# Altium PCB RS485集线器.PcbDoc
Units mm, origin at the board's own origin, x right, y up, seen from the top; angles counter-clockwise.
Board outline 75.5 x 100 mm, 2 copper layers (Top Layer, Bottom Layer); 91 components, 148 nets, 377 pads, 105 vias.
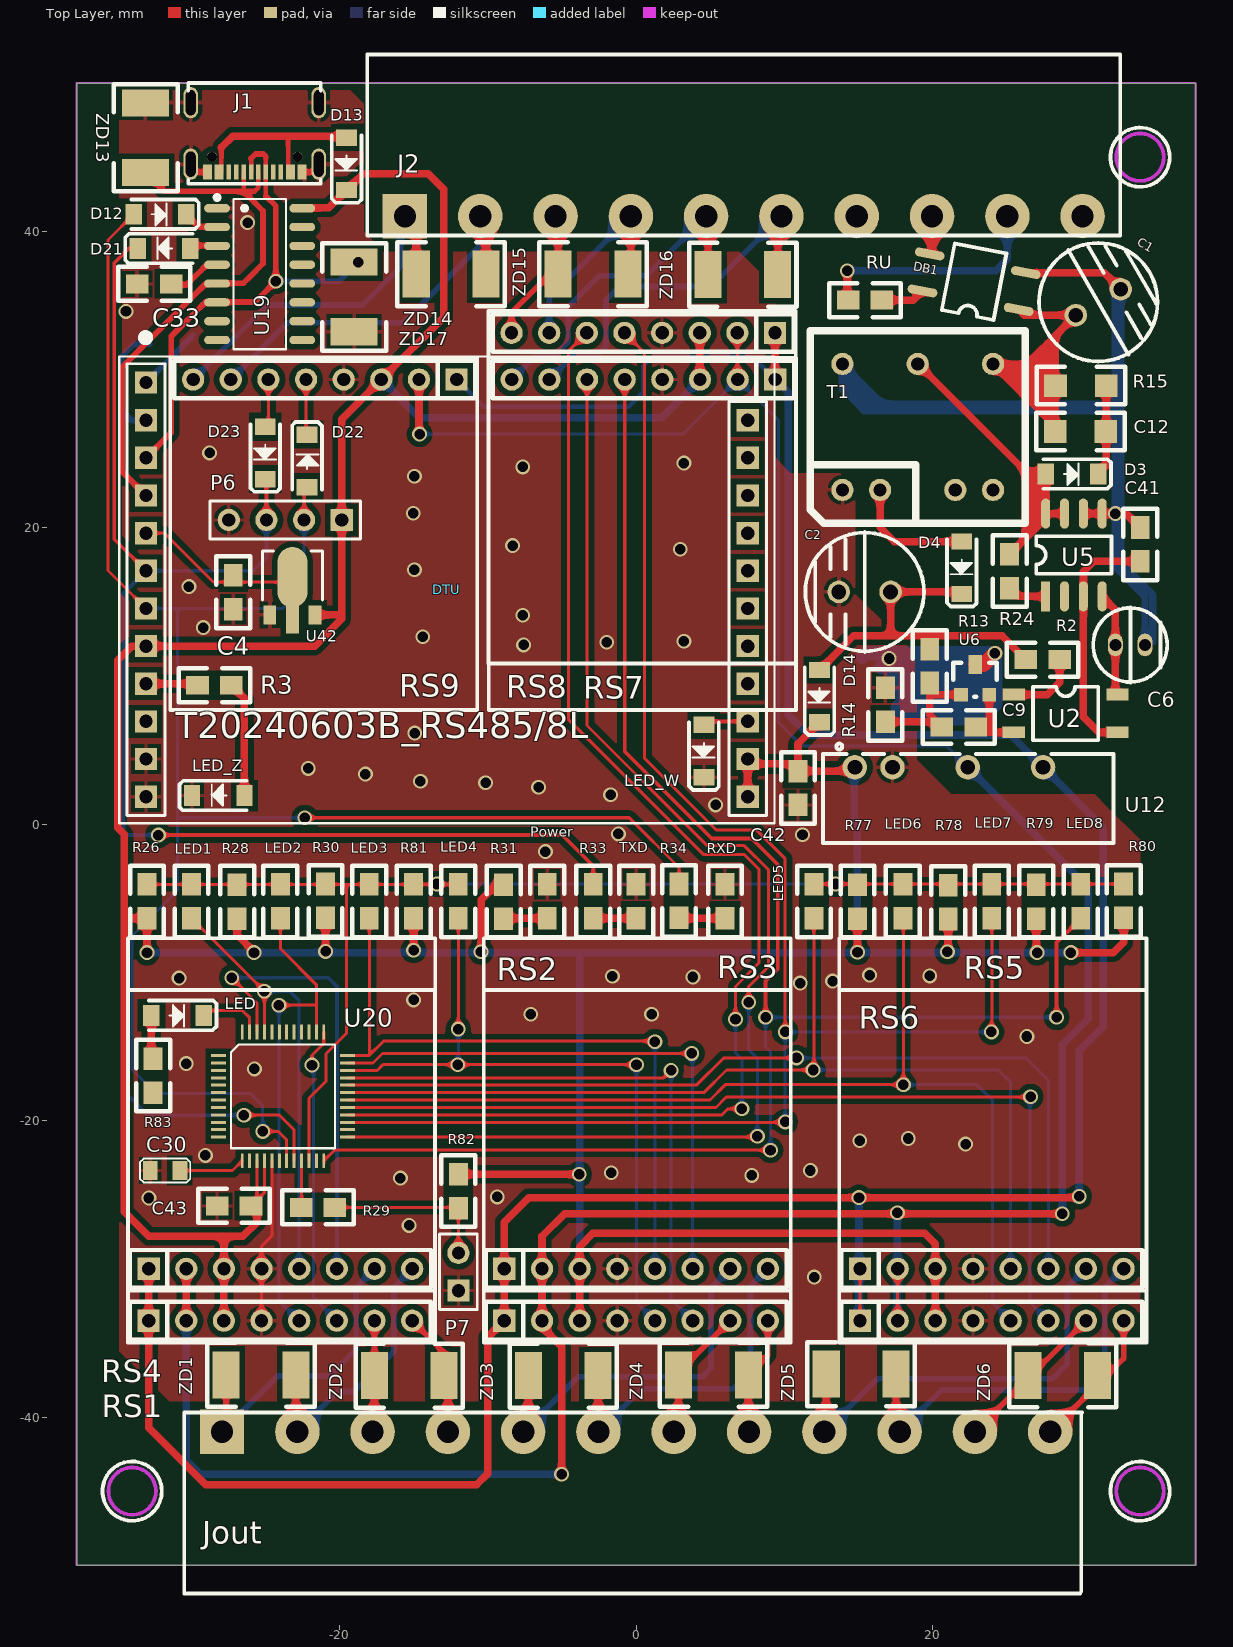
[diagram p0: Top Layer view]
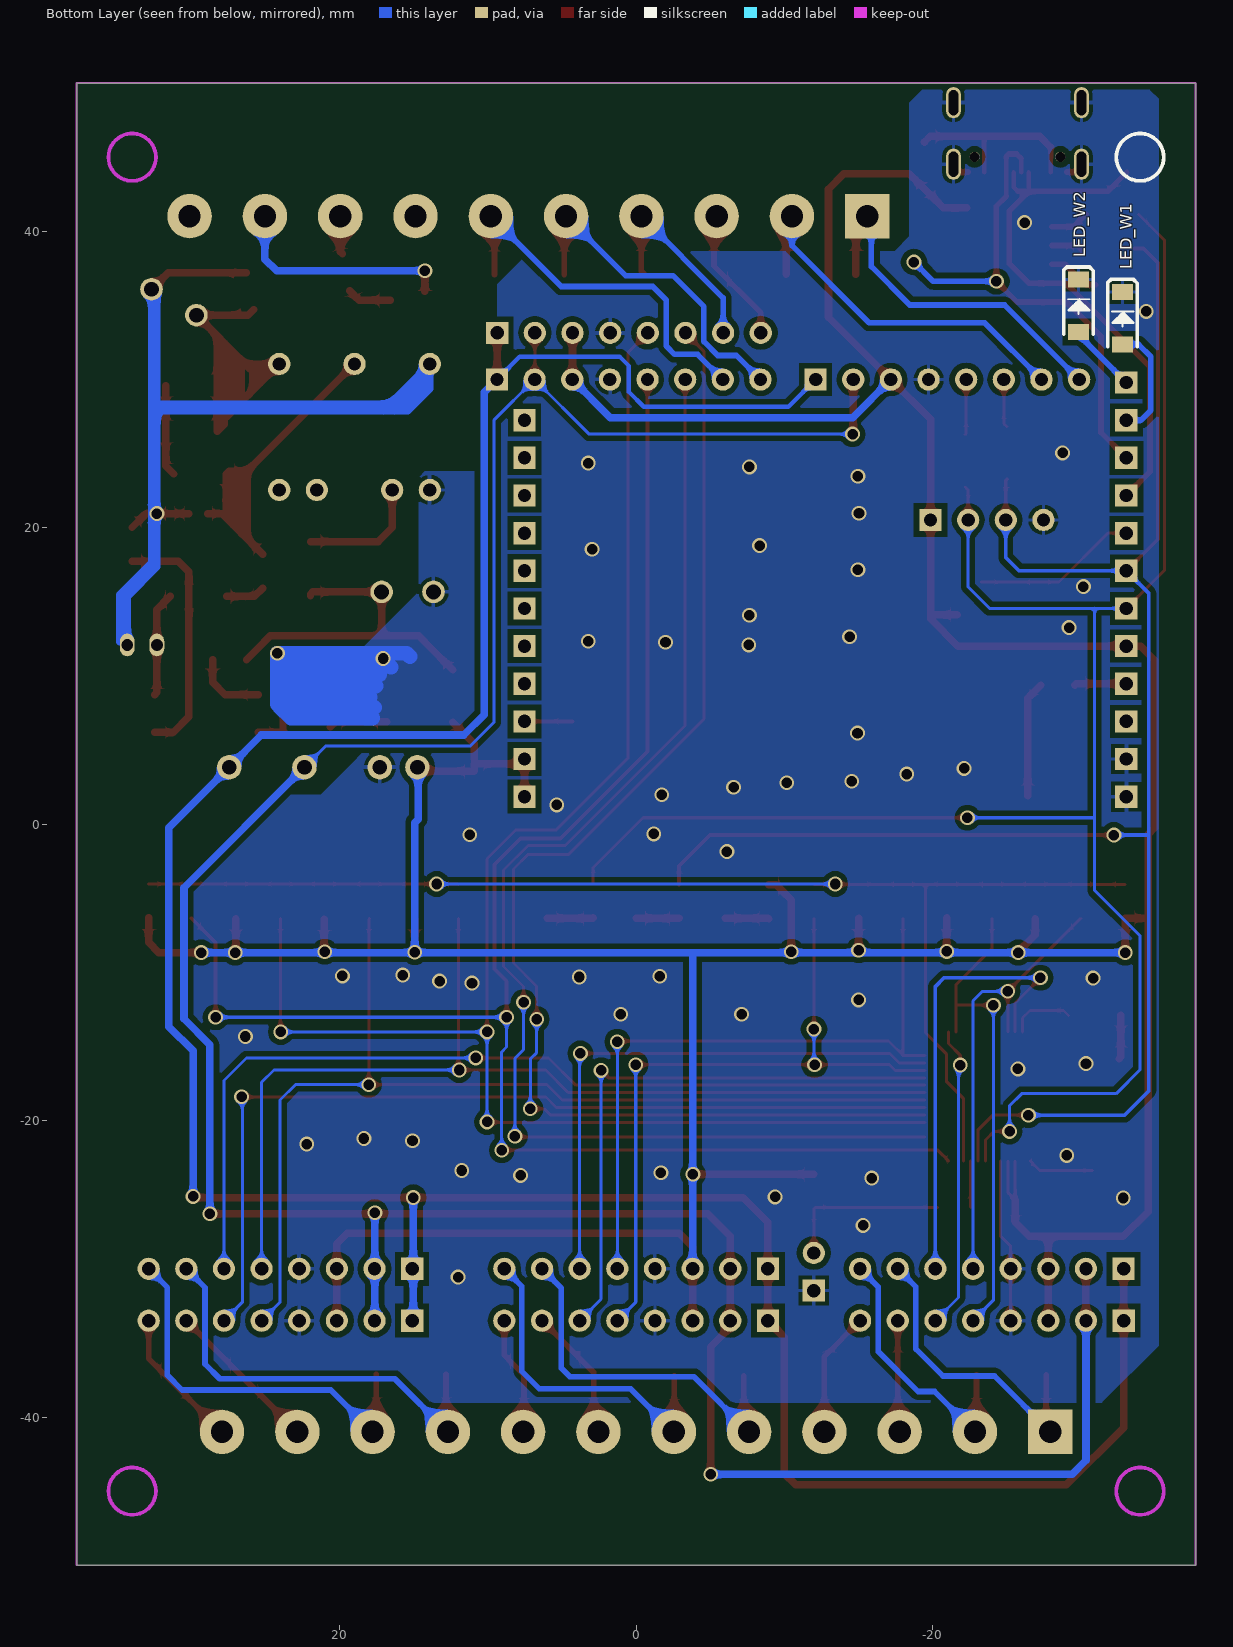
[diagram p1: Bottom Layer view, seen from below]

## Layer stack, top to bottom
Top Solder: solder mask 0.0102, Solder Resist, Dk 3.5
Top Layer: signal copper 0.0356
Dielectric1: dielectric 0.32, FR-4, Dk 4.8
Bottom Layer: signal copper 0.0356
Bottom Solder: solder mask 0.0102, Solder Resist, Dk 3.5

## Board outline
-37.75,-50 -37.75,50 37.75,50 37.75,-50

## Design rules (kind name [scope] priority, off if disabled: settings)
Clearance Clearance_1 [InPolygon] p1: gap=0.381
Clearance [All] p2: gap=0.127
DiffPairsRouting [All] p1: maxlimit=0.254 minlimit=0.254 mostfreqgap=0.254 toplayer_minwidth=0.381 toplayer_maxwidth=0.381 toplayer_prefwidth=0.381 bottomlayer_minwidth=0.381 bottomlayer_maxwidth=0.381 bottomlayer_prefwidth=0.381 maxuncoupledlength=12.7
PolygonConnect PolygonConnect_1 [IsVia] p1: connectstyle=Direct reliefconductorwidth=0.254 reliefentries=4 polygonreliefangle="90 Angle" airgapwidth=0.254
PolygonConnect [All] p2: connectstyle=Relief reliefconductorwidth=0.254 reliefentries=4 polygonreliefangle="90 Angle" airgapwidth=0.254
RoutingVias [All] p1: holewidth=0.711 width=1.27 viastyle="Through Hole" minholewidth=0.711 minwidth=1.27 maxholewidth=0.711 maxwidth=1.27
SilkToSolderMaskClearance SilkscreenOverComponentPads [IsPad] p1: minsilkscreentomaskgap=0.025 clearancetoexposedcopper=TRUE
SolderMaskExpansion [All] p1: expansion=0.102
Width [All] p1: maxlimit=5.08 minlimit=0.127 preferedwidth=0.254
28 further rules are at their usual default settings.

## Classes and differential pairs
component class Sheet2: D10 D11 J1 P6 P7 R29 R32 R33 R34 R35 R36
component class rs485: C70 L4 R3 R4 R5 R6 R7 R8 R9 R10 R11 R12 R19 U3 U4 U12 U19
differential pair USB: +USB_P -USB_N
differential pair 4851: +4851_P -4851_N
differential pair 4852: +4852_P -4852_N
differential pair 4853: +4853_P -4853_N
differential pair 4854: +4854_P -4854_N
differential pair 4855: +4855_P -4855_N
differential pair 4856: +4856_P -4856_N
differential pair 4857: +4857_P -4857_N
differential pair 4858: +4858_P -4858_N

## Components (designator, comment, footprint, x,y, rotation, side; value= is the part's Value field where it differs from the comment)
C1 "400V/4.7uF" cap8mm 29.667,34.341 r30 top (schematic designator C01)
C2 "10V/1000uF" cap8mm 17.17,15.672 r180 top (schematic designator C01)
C4 "10uF" 0805#1 -27.178,16.789 r270 top
C6 "50V/22uF" cap5mm 32.334,12.09 r0 top (schematic designator C03)
C9 "104" 0805#2 22.911,6.553 r180 top
C12 "103" 1206 28.27,26.492 r0 top
C30 "0.1uF/16V/X5R" 0805C -30.785,-23.368 r180 top (schematic designator C16)
C33 "0.1uF/50V/X5R" 0805#1 -31.369,36.449 r180 top
C41 "103" 0805#3 34.011,17.729 r90 top
C42 "106" 0805#3 10.922,1.295 r90 top
C43 "105" 0805#3 -25.984,-25.756 r180 top
D3 "ES1JS/SOD-123" "D SOD-123(B)" 29.413,23.622 r180 top (schematic designator D7)
D4 "1N5819W/SOD-123" "D SOD-123(B)" 21.971,17.297 r90 top (schematic designator D7)
D12 "1N5819/SOD-123" "D SOD-123(B)" -32.131,41.148 r180 top (schematic designator D7)
D13 "1N5819/SOD-123" "D SOD-123(B)" -19.533,44.552 r90 top (schematic designator D7)
D14 "1N5819/SOD-123" "D SOD-123(B)" 12.37,8.636 r90 top (schematic designator D7)
D21 "1N5819/SOD-123" "D SOD-123(B)" -31.852,38.837 r0 top (schematic designator D7)
D22 "1N5819/SOD-123" "D SOD-123(B)" -22.2,24.511 r270 top (schematic designator D7)
D23 "1N5819/SOD-123" "D SOD-123(B)" -25.019,25.044 r90 top (schematic designator D7)
DB1 "MB6S" SO-4#1 25.806,34.722 r169 top
DTU "Comment" USR-GPRS232-7S3_LIB_V1.0 -33.071,29.794 r0 top
J1 "TYPE C_16P" TYPEC_16P -25.73,48.285 r180 top
J2 "CON10" SIP5.08-10 7.264,41.021 r0 top
Jout "Comment" PCBComponent_1#1 0,-41 r0 top locked
LED "1N5819/SOD-123" "D SOD-123(B)" -30.937,-12.903 r180 top (schematic designator D7)
LED1 "蓝色" 0805#4 -30,-4.064 r270 top
LED2 "蓝色" 0805#4 -24,-4.064 r270 top
LED3 "蓝色" 0805#4 -18,-4.064 r270 top
LED4 "蓝色" 0805#4 -12,-4.064 r270 top
LED5 "蓝色" 0805#4 12,-4.064 r270 top
LED6 "蓝色" 0805#4 18,-4.064 r270 top
LED7 "蓝色" 0805#4 24,-4.064 r270 top
LED8 "蓝色" 0805#4 30,-4.064 r270 top
LED_W "1N5819/SOD-123" "D SOD-123(B)" 4.572,4.928 r90 top (schematic designator D7)
LED_W1 "1N5819/SOD-123" "D SOD-123(B)" -32.817,34.138 r270 bottom (schematic designator D7)
LED_W2 "1N5819/SOD-123" "D SOD-123(B)" -29.845,34.976 r270 bottom (schematic designator D7)
LED_Z "1N5819/SOD-123" "D SOD-123(B)" -28.194,1.93 r0 top (schematic designator D7)
P6 "Header 4" HDR1X4 -19.863,20.523 r180 top
P7 "Header 2" HDR1X2 -11.989,-31.471 r90 top
Power "红色" 0805#4 -6,-4.064 r270 top
R2 "330R" 0805#4 28.575,11.1 r180 top
R3 "1K" 0805#1 -29.591,9.373 r0 top
R13 "3.3K" 0805#5 19.812,9.525 r90 top
R14 "10K" 0805#6 16.815,9.195 r270 top
R15 "75K" 1206 28.296,29.591 r0 top
R24 "2.2M" 0805#6 25.197,18.212 r270 top
R26 "1K" 0805#4 -33,-4.064 r270 top
R28 "1K" 0805#4 -26.924,-4.089 r270 top
R29 "10K" 0805#4 -20.32,-25.857 r180 top
R30 "1K" 0805#4 -20.955,-4.039 r270 top
R31 "1K" 0805#4 -8.941,-4.089 r270 top
R33 "1K" 0805#4 -2.896,-4.064 r270 top
R34 "1K" 0805#4 2.896,-4.039 r270 top
R77 "1K" 0805#4 14.935,-4.089 r270 top
R78 "1K" 0805#4 21.057,-4.115 r270 top
R79 "1K" 0805#4 27,-4.089 r270 top
R80 "1K" 0805#4 32.893,-4.039 r270 top
R81 "1K" 0805#4 -15.011,-4.064 r270 top
R82 "10K" 0805#4 -11.989,-25.908 r90 top
R83 "1K" 0805#4 -32.588,-15.824 r270 top
RS1 "RS485" PCBComponent_1#2 -24.003,-33.5 r0 top
RS2 "RS485" PCBComponent_1#2 0,-33.5 r0 top
RS3 "RS485" PCBComponent_1#2 24,-33.5 r0 top
RS4 "RS485" PCBComponent_1#2 -24,-30 r0 top
RS5 "RS485" PCBComponent_1#2 0,-30 r0 top
RS6 "RS485" PCBComponent_1#2 24,-30 r0 top
RS7 "RS485" PCBComponent_1#2 0.483,33.147 r180 top
RS8 "RS485" PCBComponent_1#2 0.5,30 r180 top
RS9 "RS485" PCBComponent_1#2 -21,30 r180 top locked
RU "0R" 0805#3 16.586,35.357 r180 top
RXD "蓝色" 0805#4 6,-4.064 r270 top
T1 "Comment" ? 18.999,26.797 r0 top
TXD "绿色" 0805#4 0,-4.064 r270 top
U2 "EL357" SO-4#2 28.981,7.468 r0 top
U5 "DK106" SO-8 27.635,15.367 r90 top
U6 "TL432" SOT-23 21.92,8.738 r0 top
U12 "B0505LS-1W" PWRM-TH_4P-L19.7-W6.0-P2.54 21.107,3.835 r0 top
U19 "CH340C" SOP-16_L10.0-W3.9-P1.27-LS6.0-BL -25.4,37.109 r270 top
U20 "STC8H4K64TCL_48" LQPF48 -23.825,-18.364 r270 top
U42 "LM1117" SOT-89 -24.714,14.122 r180 top
ZD1 "SMBJ6.5CA" 1812 -22.962,-37.16 r0 top (schematic designator ZD8)
ZD2 "SMBJ6.5CA" 1812 -12.954,-37.211 r0 top (schematic designator ZD8)
ZD3 "SMBJ6.5CA" 1812 -2.565,-37.211 r0 top (schematic designator ZD8)
ZD4 "SMBJ6.5CA" 1812 7.569,-37.16 r0 top (schematic designator ZD8)
ZD5 "SMBJ6.5CA" 1812 17.526,-37.109 r0 top (schematic designator ZD8)
ZD6 "SMBJ6.5CA" 1812 31.14,-37.186 r0 top (schematic designator ZD8)
ZD13 "SMBJ6.5CA" 1812 -33.096,43.967 r270 top (schematic designator ZD8)
ZD14 "SMBJ6.5CA" 1812 -10.135,37.109 r0 top (schematic designator ZD8)
ZD15 "SMBJ6.5CA" 1812 -0.559,37.109 r0 top (schematic designator ZD8)
ZD16 "SMBJ6.5CA" 1812 9.55,37.084 r0 top (schematic designator ZD8)
ZD17 "SMBJ6.5CA" 1812 -19.025,33.223 r270 top (schematic designator ZD8)

## Footprints (in the part's own frame and the unit in brackets; to place one, negate y for a bottom-side part, rotate by r counter-clockwise, add the part's x,y. Pads: shape width x height; smd on the part's side, far side on the other; paste and mask are expansions set on the pad)
0805#1 [mil]
  rect 60x50 smd: 1(0,0) 2(90,0)
  silkscreen extent -50,-45 140,45
0805#2 [mil]
  rect 60x50 smd: 33(0,0) 34(90,0)
  silkscreen extent -50,-45 140,45
0805#3 [mil]
  rect 60x50 smd: 19(0,0) 20(90,0)
  silkscreen extent -50,-45 140,45
0805#4 [mil]
  rect 60x50 smd: 37(0,0) 38(90,0)
  silkscreen extent -50,-45 140,45
0805#5 [mil]
  rect 60x50 smd: 35(0,0) 36(90,0)
  silkscreen extent -50,-45 140,45
0805#6 [mil]
  rect 60x50 smd: 31(0,0) 32(90,0)
  silkscreen extent -50,-45 140,45
0805C [mm]
  rect 1x1.3 smd: 1(0,0) 2(2,0)
  silkscreen extent -0.7,-0.8 2.7,0.8
1206 [mil]
  rect 60x60 smd: 17(0,0) 18(135,0)
  silkscreen extent -50,-50 185,50
1812 [mil]
  rect 71.81x125 smd: 1(0,0) 2(-185,0)
  silkscreen extent -235,-85 50,85
cap5mm [mm]
  oval 1x1.524 hole 0.8: 1(0,0) 2(2,0)
  silkscreen extent -1.5,-2.54 3.5,2.54
cap8mm [mil]
  round 60 hole 39.37: 1(0,0) 2(137.8,0)
  silkscreen extent -89,-160 226,160
"D SOD-123(B)" [mm]
  rect 1.1x1.4 smd: A(1.77,0) K(-1.77,0)
  silkscreen extent -2.62,-1 1.93,1
HDR1X2 [mm] "Connector; Header; 2 Position"
  rect 1.5x1.5 hole 0.9: 1(0,0)
  round 1.5 hole 0.9: 2(2.54,0)
  silkscreen extent -1.27,-1.27 3.81,1.27
HDR1X4 [mm] "Connector; Header; 4 Position"
  rect 1.5x1.5 hole 0.9: 1(0,0)
  round 1.5 hole 0.9: 2(2.54,0) 3(5.08,0) 4(7.62,0)
  silkscreen extent -1.27,-1.27 8.89,1.27
LQPF48 [mm]
  rect 0.2x1 smd: 1(-2.75,-4.35) 2(-2.25,-4.35) 3(-1.75,-4.35) 4(-1.25,-4.35) 5(-0.75,-4.35) 6(-0.25,-4.35) 7(0.25,-4.35) 8(0.75,-4.35) 9(1.25,-4.35) 10(1.75,-4.35) 11(2.25,-4.35) 12(2.75,-4.35) 25(2.75,4.35) 26(2.25,4.35) 27(1.75,4.35) 28(1.25,4.35) 29(0.75,4.35) 30(0.25,4.35) 31(-0.25,4.35) 32(-0.75,4.35) 33(-1.25,4.35) 34(-1.75,4.35) 35(-2.25,4.35) 36(-2.75,4.35)
  rect 1x0.2 smd: 13(4.35,-2.75) 14(4.35,-2.25) 15(4.35,-1.75) 16(4.35,-1.25) 17(4.35,-0.75) 18(4.35,-0.25) 19(4.35,0.25) 20(4.35,0.75) 21(4.35,1.25) 22(4.35,1.75) 23(4.35,2.25) 24(4.35,2.75) 37(-4.35,2.75) 38(-4.35,2.25) 39(-4.35,1.75) 40(-4.35,1.25) 41(-4.35,0.75) 42(-4.35,0.25) 43(-4.35,-0.25) 44(-4.35,-0.75) 45(-4.35,-1.25) 46(-4.35,-1.75) 47(-4.35,-2.25) 48(-4.35,-2.75)
  silkscreen extent -3.5,-3.5 3.5,3.5
PCBComponent_1#1 [mm]
  rect 3x3 hole 1.5: 1(-27.94,0)
  round 3 hole 1.5: 2(-22.86,0) 3(-17.78,0) 4(-12.7,0) 5(-7.62,0) 6(-2.54,0) 7(2.54,0) 8(7.62,0) 9(12.7,0) 10(17.78,0) 11(22.86,0) 12(27.94,0)
  silkscreen extent -30.48,-10.9 30.1,1.3
PCBComponent_1#2 [mm]
  rect 1.5x1.5 hole 0.9: 1(-8.89,0)
  round 1.5 hole 0.9: 2(-3.81,0) 3(1.27,0) 4(3.81,0) 5(6.35,0) 6(8.89,0) 7(-6.35,0) 8(-1.27,0)
  silkscreen extent -10.29,-1.47 10.44,22.31
PWRM-TH_4P-L19.7-W6.0-P2.54 [mm]
  round 1.65 hole 1 paste+0 mask+0.05: 1(-6.35,0) 2(-3.81,0) 4(1.27,0) 6(6.35,0)
  silkscreen extent -8.5,-5.1 11.1,1.6
SIP5.08-10 [mm]
  rect 3x3 hole 1.5: 1(-22.86,0)
  round 3 hole 1.5: 2(-17.78,0) 3(-12.7,0) 4(-7.62,0) 5(-2.54,0) 6(2.54,0) 7(7.62,0) 8(12.7,0) 9(17.78,0) 10(22.86,0)
  silkscreen extent -25.4,-1.3 25.4,10.9
SO-4#1 [mil]
  oval 80x24 smd: 1(0,0) 2(0,-100) 3(260,-100) 4(260,0)
  silkscreen extent 60,-140 200,40
SO-4#2 [mil]
  rect 59.05x31.5 smd: 1(-137.8,50) 2(-137.8,-50) 3(137.8,-50) 4(137.8,50)
  silkscreen extent -87,-71 87,71
SO-8 [mil]
  rect 80x24 smd: 1(0,0)
  oval 80x24 smd: 2(0,-50) 3(0,-100) 4(0,-150) 5(220,-150) 6(220,-100) 7(220,-50) 8(220,0)
  silkscreen extent 60,-175 160,25
SOP-16_L10.0-W3.9-P1.27-LS6.0-BL [mm]
  oval 0.56x1.745 smd: 1(-4.445,-2.872) 2(-3.175,-2.872) 3(-1.905,-2.872) 4(-0.635,-2.872) 5(0.635,-2.872) 6(1.905,-2.872) 7(3.175,-2.872) 8(4.445,-2.872) 9(4.445,2.872) 10(3.175,2.872) 11(1.905,2.872) 12(0.635,2.872) 13(-0.635,2.872) 14(-1.905,2.872) 15(-3.175,2.872) 16(-4.445,2.872)
  silkscreen extent -5.33,-3.02 5.08,1.77
SOT-23 [mil]
  rect 36x36 smd: 1(0,0) 2(75,0)
  rect 36x50 smd: 3(38,80)
  silkscreen extent -20,-5 95,85
SOT-89 [mil]
  rect 34x50 smd: 1(0,0) 3(-120,0)
  rect 34x100 smd: 2(-60,0)
  oval 80x160 smd: 2(-60,-100)
  silkscreen extent -140,-170 20,-40
TYPEC_16P [mm]
  oval 1x2.1 hole 0.65 slot 1.7 at 90 deg: 1(-4.32,3.759) 1(-4.32,-0.391) 1(4.32,3.759) 1(4.32,-0.391)
  round 0.67 hole 0.67: 2(-2.89,3.259) 2(2.89,3.259)
  rect 0.3x1 smd: A1(-3.05,4.293) A4(-2.25,4.293) A5(-1.25,4.293) A6(-0.25,4.293) A7(0.25,4.293) A8(1.25,4.293) A9(2.25,4.293) A12(3.35,4.293) B1(3.05,4.293) B4(2.55,4.293) B5(1.75,4.293) B6(0.75,4.293) B7(-0.75,4.293) B8(-1.75,4.293) B9(-2.55,4.293) B12(-3.35,4.293)
  silkscreen extent -4.45,-1.73 4.49,5.07
USR-GPRS232-7S3_LIB_V1.0 [mm]
  rect 1.5x1.5 hole 0.9: 1(0,0) 2(0,-2.54) 3(0,-5.08) 4(0,-7.62) 5(0,-10.16) 6(0,-12.7) 7(0,-15.24) 8(0,-17.78) 9(0,-20.32) 10(0,-22.86) 11(0,-25.4) 12(0,-27.94) 13(40.6,-27.94) 14(40.6,-25.4) 15(40.6,-22.86) 16(40.6,-20.32) 17(40.6,-17.78) 18(40.6,-15.24) 19(40.6,-12.7) 20(40.6,-10.16) 21(40.6,-7.62) 22(40.6,-5.08) 23(40.6,-2.54)
  silkscreen extent -1.8,-29.74 42.4,3.16
? [mm]
  round 1.5 hole 0.9: 1(-5.08,-4.25) 2(-2.54,-4.25) 3(2.54,-4.25) 4(5.08,-4.25) 5(5.08,4.25) 6(0,4.25) 7(-5.08,4.25)
  silkscreen extent -7.25,-6.5 7.25,6.5

## Part data
C1 C2 C6: library part "Cap Pol1", "Polarized Capacitor (Radial)"
C30: library part CAP4, "贴片电容 20%"
D3 D4 D12 D13 D14 D21 D22 D23 LED LED_W LED_W1 LED_W2 LED_Z: library part SS23, "Schottky Barrier Re"
P6: "Header, 4-Pin"
P7: "Header, 2-Pin"
U12: library part B0505S
U42: library part VOLTERGB
ZD1 ZD2 ZD3 ZD4 ZD5 ZD6 ZD13 ZD14 ZD15 ZD16 ZD17: library part ZENER-BI

## Via types
v1: diameter 1, hole 0.711, Top Layer to Bottom Layer, 105 vias

## Nets (pads, with @x,y where several pads share a name; then routed paths per layer and width w, separated by ;. In a path a pad name is that pad's centre, name@x,y a point inside that pad or via, vN(x,y) a via of type N, cw(c..) or ccw(c..) an arc to the next point about the centre after c; other vN are vias at no path point)
0V: RS1.7 RS2.7 RS3.7 RS4.7 RS5.7 RS6.7 RS7.7 RS8.7 RS9.7 U12.4 | length 204.1
  Top Layer w0.2: RS7.7 6.833,30.017 RS8.7
  Top Layer w0.203: RS3.7 RS6.7
  Top Layer w0.508: RS1.7 -30.35,-33.497 RS4.7 ; RS9.7 -14.65,26.359 v1(-14.605,26.314) ; v1(-5.029,-43.866) -5.029,-35.255 -6.35,-33.934 RS2.7 RS5.7 -6.35,-27.813 -4.826,-26.289 v1(28.753,-26.289)
  Bottom Layer w0.2: v1(-14.605,26.314) 3.164,26.314 RS8.7 9.601,27.249 9.601,6.858 11.201,5.258 20.955,5.258 U12.4
  Bottom Layer w0.508: RS1.7 -30.353,-42.926 -29.413,-43.866 v1(-5.029,-43.866) ; v1(17.628,-26.213) 17.628,-33.478 RS3.7 ; U12.4 30.505,-4.292 30.505,-13.132 28.753,-14.884 v1(28.753,-26.289)
3.3A: C4.1 DTU.5 U42.2 | length 11.2
  Top Layer w0.203: DTU.5 -31.826,19.634 -28.524,16.332 U42.2@-23.266,16.332
5V: 
5V_OUT1: R83.38
300V+: C1.1 C12.17 DB1.1 R15.17 T1.5 | length 52.1
  Top Layer w0.5: 25.582,29.544 25.375,29.752 ; DB1.1 26.187,34.341 C1.1 28.27,32.944 ; 26.67,28.456 26.645,28.482 ; T1.5@24.511,31.047 25.375,31.047 ; T1.5@24.511,31.047 T1.5 25.375,29.752 ; T1.5@24.511,31.047 24.9,30.658 25.375,30.658 ; 25.375,29.752 25.857,29.269 ; 25.375,29.752 25.375,30.658 ; 25.375,30.658 25.857,30.658 ; 25.375,30.658 25.375,31.047 ; 25.375,31.047 25.857,31.047 ; 25.857,29.269 25.857,30.658 ; 25.857,29.269 26.645,28.482 ; 25.857,30.658 25.984,30.658 26.373,31.047 ; 25.857,30.658 25.857,31.047 ; 25.857,31.047 26.373,31.047 ; 26.373,31.047 26.772,31.445 ; 26.373,31.047 26.645,31.047 ; 26.645,28.482 26.915,28.211 ; 26.645,28.482 26.645,31.047 ; 26.645,31.047 26.924,31.047 ; 26.772,31.445 27.241,31.915 ; 26.772,31.445 28.067,31.445 ; 26.915,28.211 27.322,27.804 ; 26.915,28.211 26.924,28.219 26.924,31.047 ; 26.924,31.047 27.322,30.649 27.322,27.804 ; 26.924,31.047 27.457,31.047 ; 27.241,31.915 27.756,31.915 ; 27.241,31.915 27.756,32.429 ; 27.322,27.804 27.788,27.339 ; 27.322,27.804 27.457,27.94 27.457,31.047 ; 27.457,31.047 27.788,31.047 ; 27.756,31.915 28.207,31.915 28.27,31.979 ; 27.756,31.915 27.756,32.429 ; 27.756,31.915 27.756,31.756 28.067,31.445 ; 27.756,32.429 28.27,32.944 ; 27.756,32.429 28.15,32.429 28.27,32.309 ; 27.788,27.339 27.788,31.047 ; 27.788,27.339 C12.17@28.27,26.856 ; 27.788,27.339 27.788,26.975 C12.17 C12.17@28.27,26.856 ; 27.788,31.047 28.075,31.047 28.27,31.242 ; 28.067,31.445 28.27,31.242 ; C12.17@28.27,26.856 28.27,31.242 ; 28.27,31.242 28.27,31.979 ; 28.27,31.979 28.27,32.309 ; 28.27,32.309 28.27,32.944
300V-: C1.2 C6.2 C41.20 DB1.2 T1.7 U5.5 U5.6 | length 113.8
  Top Layer w0.5: DB1.2 31.574,37.215 C1.2 ; U5.6 U5.5 v1(32.334,20.955) 33.071,20.955 C41.20
  Bottom Layer w0.5: 13.919,29.616 13.919,30.277 ; 13.919,29.616 13.919,29.362 14.935,28.346 ; 13.919,29.616 15.189,28.346 ; 13.919,30.277 T1.7@13.919,30.632 ; 13.919,30.277 15.85,28.346 ; T1.7@13.919,30.632 16.205,28.346 ; T1.7@13.919,30.632 T1.7 16.62,28.346 ; 14.935,28.346 15.189,28.346 ; 14.935,28.346 15.392,27.889 15.646,27.889 ; 15.189,28.346 15.85,28.346 ; 15.189,28.346 15.646,27.889 ; 15.646,27.889 16.307,27.889 ; 15.85,28.346 16.205,28.346 ; 15.85,28.346 16.307,27.889 ; 16.205,28.346 16.662,27.889 ; 16.205,28.346 16.62,28.346 ; 16.307,27.889 16.662,27.889 ; 16.62,28.346 32.233,28.346 32.334,28.448 ; 16.62,28.346 17.077,27.889 ; 16.662,27.889 17.077,27.889 ; 17.077,27.889 32.029,27.889 32.334,27.584 ; 32.334,27.584 32.334,28.448 ; 32.334,27.584 v1(32.334,20.955) 32.334,17.348 34.334,15.348 C6.2 34.537,12.294 34.849,12.294 34.849,15.494 32.698,17.645 C1.2 32.334,35.727 32.334,28.448
4851_N: Jout.1 RS4.5 ZD1.2 | length 21.3
  Top Layer w0.381: Jout.1 -27.661,-40.721 ZD1.2
  Bottom Layer w0.381: Jout.1 -24.176,-37.236 -20.701,-37.236 -18.872,-35.408 -18.872,-31.222 RS4.5
4851_P: Jout.2 RS4.6 ZD1.1 | length 18.7
  Top Layer w0.381: ZD1.1 -22.962,-40.898 Jout.2
  Bottom Layer w0.381: Jout.2 -20.138,-38.278 -19.025,-38.278 -16.332,-35.585 -16.332,-31.222 RS4.6
4852_N: Jout.3 RS1.5 ZD2.2 | length 7.6
  Top Layer w0.381: Jout.3 -17.653,-40.873 ZD2.2 RS1.5
4852_P: Jout.4 RS1.6 ZD2.1 | length 8.5
  Top Layer w0.381: RS1.6 -12.7,-35.913 Jout.4
4853_N: Jout.5 RS5.5 ZD3.2 | length 25.6
  Top Layer w0.381: Jout.5 -7.264,-40.644 ZD3.2
  Bottom Layer w0.381: Jout.5 -3.907,-37.287 4.47,-37.287 5.055,-36.703 5.055,-31.295 RS5.5
4853_P: Jout.6 RS5.6 ZD3.1 | length 23.1
  Top Layer w0.381: ZD3.1 -2.565,-40.975 Jout.6
  Bottom Layer w0.381: Jout.6 0.36,-38.1 6.528,-38.1 7.722,-36.906 7.722,-31.168 RS5.6
4854_N: Jout.7 RS2.5 ZD4.2 | length 9.1
  Top Layer w0.381: Jout.7 2.87,-40.67 ZD4.2 2.87,-36.98 RS2.5
4854_P: Jout.8 RS2.6 ZD4.1 | length 8.1
  Top Layer w0.381: Jout.8 7.569,-40.949 ZD4.1 8.89,-35.839 RS2.6
4855_N: Jout.9 RS6.5 ZD5.2 | length 29.2
  Top Layer w0.381: Jout.9 12.827,-40.873 ZD5.2
  Bottom Layer w0.381: Jout.9 16.286,-37.414 28.092,-37.414 29.083,-36.424 29.083,-31.267 RS6.5
4855_P: Jout.10 RS6.6 ZD5.1 | length 27.1
  Top Layer w0.381: ZD5.1 17.526,-40.746 Jout.10
  Bottom Layer w0.381: Jout.10 20.604,-38.176 30.632,-38.176 31.623,-37.186 31.623,-31.267 RS6.6
4856_N: Jout.11 RS3.5 ZD6.2 | length 10.6
  Top Layer w0.381: Jout.11 22.86,-40.99 RS3.5
4856_P: Jout.12 RS3.6 ZD6.1 | length 9.6
  Top Layer w0.381: Jout.12 32.89,-36.05 RS3.6
4857_N: J2.3 RS7.6 ZD15.2 | length 9.3
  Top Layer w0.381: RS7.6 -8.407,34.519 -5.258,37.668 -5.258,40.843 J2.3
4857_P: J2.4 RS7.5 ZD15.1 | length 14.2
  Top Layer w0.381: ZD15.1 -0.356,37.313 J2.4
  Bottom Layer w0.381: RS7.5 -5.867,35.509 J2.4
4858_N: J2.5 RS8.6 ZD16.2 | length 23.1
  Top Layer w0.381: J2.5 4.851,40.894 ZD16.2
  Bottom Layer w0.381: RS8.6 -6.767,31.623 -5.512,31.623 -4.572,32.563 -4.572,34.925 -2.489,37.008 0.711,37.008 J2.5
4858_P: J2.6 RS8.5 ZD16.1 | length 26.1
  Top Layer w0.381: ZD16.1 9.55,40.767 J2.6
  Bottom Layer w0.381: RS8.5 -4.151,31.699 -2.591,31.699 -2.032,32.258 -2.032,35.357 -1.118,36.271 5.055,36.271 J2.6
+5V: RS1.1 RS2.1 RS3.1 RS4.1 RS5.1 RS6.1 RS7.1 RS8.1 RS9.1 U12.6 | length 205.7
  Top Layer w0.203: RS3.1 RS6.1
  Top Layer w0.508: RS4.1 -32.89,-33.497 RS1.1 -32.893,-40.716 -29.032,-44.577 -10.77,-44.577 -10.008,-43.815 -10.008,-34.618 RS2.1 RS5.1 -8.89,-26.848 -7.239,-25.197 v1(15.037,-25.197) v1@29.896,-25.197 ; RS7.1 9.373,30.017 RS8.1
  Bottom Layer w0.3: RS9.1 -10.279,28.169 -0.508,28.169 0.483,29.159 0.483,30.912 1.118,31.547 7.843,31.547 RS8.1
  Bottom Layer w0.508: RS8.1 10.262,29.128 10.262,7.384 11.63,6.016 25.277,6.016 U12.6 31.521,-0.228 31.521,-13.665 29.896,-15.291 v1(29.896,-25.121) ; v1(15.037,-25.197) 15.037,-33.427 RS3.1
-12V: R24.32 U5.1 | length 2.7
  Top Layer w0.5: R24.32 25.756,15.367 U5.1
AGND: 
BOOT: R29.38 U20.21 | length 3.2
  Top Layer w0.203: R29.38 -22.575,-25.826 U20.21
CF1: J2.1 RS9.6 ZD14.2 | length 24.9
  Top Layer w0.508: J2.1 -14.834,40.259 ZD14.2
  Bottom Layer w0.381: RS9.6 -24.863,35.027 -18.466,35.027 -15.875,37.617 -15.875,40.742 J2.1
CF2: J2.2 RS9.5 ZD14.1 | length 26.6
  Top Layer w0.508: J2.2 -10.135,40.64 ZD14.1
  Bottom Layer w0.381: RS9.5 -23.517,33.833 -15.723,33.833 -10.516,39.04 J2.2
DEBUG: LED.K U20.47 | length 4.4
  Top Layer w0.203: LED.K -28.837,-12.573 -26.568,-12.573 -26.075,-13.066 U20.47
EARTH: J2.9 RU.20 | length 15.4
  Top Layer w0.5: RU.20@14.249,35.966 v1(14.249,37.338)
  Bottom Layer w0.5: v1(14.249,37.338) 24.257,37.338 25.044,38.125 25.044,38.837 J2.9
GND: C2.2 C4.2 C30.2 C33.2 C42.19 C43.20 DTU.11 DTU.12 J1.1 J1.A1 J1.A12 J1.B1 J1.B12 LED_W1.K LED_W2.K LED_W.K LED_Z.K P6.4 P7.1 Power.37 R14.31 RS1.8 RS2.8 RS3.8 RS4.8 RS5.8 RS6.8 RS7.8 RS8.8 RS9.8 RXD.37 T1.1 TXD.37 U6.3 U12.2 U19.1 U20.17 U42.1 ZD13.2 ZD17.1 | length 68.4
  Top Layer w0.2: RS1.8 -25.273,-28.473 -24.575,-27.776 U20.17
  Top Layer w0.4: J1.1@-30.05,44.526 -29.517,43.993 J1.A12 ; J1.B12 -21.944,43.993 J1.1@-21.41,44.526
  Top Layer w1: U6.3 23.444,10.77 v1(24.206,11.532)
  Bottom Layer w1: 15.265,11.303 15.494,11.532 v1(24.206,11.532) 24.206,10.897 ; 16.535,10.592 16.84,10.897 24.206,10.897 ; 17.297,10.084 24.155,10.084 24.206,10.033 ; 17.551,9.322 24.181,9.322 24.206,9.296 ; 17.653,7.874 23.994,7.874 ; 17.766,7.169 23.289,7.169 23.994,7.874 ; 17.958,8.56 24.054,8.56 24.206,8.712 ; 23.994,7.874 24.206,8.086 24.206,8.712 ; 24.206,8.712 24.206,9.296 ; 24.206,9.296 24.206,10.033 ; 24.206,10.033 24.206,10.897
  other v1: 12.014,-30.556 -15.316,-27.076 -32.868,-25.222 -9.373,-25.146 -15.9,-23.876 7.798,-23.698 -1.676,-23.52 11.76,-23.368 -29.058,-22.352 22.225,-21.59 15.088,-21.361 18.364,-21.209 -25.756,-16.51 -30.353,-16.154 26.365,-14.326 -7.112,-12.827 1.041,-12.827 -15.011,-11.862 11.074,-10.719 13.259,-10.592 -30.836,-10.389 3.835,-10.312 -1.6,-10.262 19.812,-10.236 15.748,-10.185 -6.121,-1.854 11.227,-0.711 -1.194,-0.66 5.359,1.295 -1.727,1.981 -6.579,2.489 -10.16,2.794 -14.554,2.896 -18.263,3.378 -22.123,3.759 -14.935,6.147 17.069,11.176 -7.595,12.09 -1.981,12.268 3.226,12.344 -14.402,12.649 -29.21,13.259 -7.645,14.097 -30.175,16.027 -14.961,17.17 2.972,18.542 -8.331,18.796 -15.037,20.98 -14.961,23.47 -7.645,24.105 3.226,24.359 -28.778,25.044 -34.417,34.595 -26.213,40.589
INT: LED1.37 LED2.37 LED3.37 LED4.37 LED5.37 LED6.37 LED7.37 LED8.37 R26.37 R28.37 R30.37 R77.37 R78.37 R79.37 R80.37 R81.37 U20.22 | length 88.5
  Top Layer w0.203: R26.37 LED1.37 LED2.37 -19.533,-4.064 ; U20.22 -22.075,-18.494 -20.93,-17.348 -20.93,-15.494 -19.533,-14.097 -19.533,-4.064 ; LED4.37 R81.37 LED3.37 -19.533,-4.064 ; LED5.37 12.025,-4.039 v1(13.462,-4.039) R80.37
  Bottom Layer w0.203: v1(-13.437,-4.039) v1(13.462,-4.039)
L: DB1.3 J2.8 | length 2.6
  Top Layer w0.5: DB1.3 19.964,38.631 J2.8
LD7: 
LD8: 
LED: 
N: DB1.4 RU.19 | length 3
  Top Layer w0.5: RU.19 18.699,35.357 DB1.4
NetC15_2: C30.1 U20.13 | length 4.5
  Top Layer w0.2: C30.1 -27.229,-23.368 U20.13
NetC30_1: C33.1 U19.4 | length 3.5
  Top Layer w0.381: C33.1@-31.013,36.398 -30.325,36.398 -28.953,37.77 U19.4@-28.044,37.77
NetC65_1: 
NetC67_2: 
NetD9_2: 
NetD10_2: 
NetD11_2: 
NetF1_2: 
NetF3_2: 
NetF4_2: 
NetF5_2: 
NetF6_2: 
NetF7_2: 
NetF8_2: 
NetF9_2: 
NetF10_2: 
NetF11_2: 
NetF12_2: 
NetF13_2: 
NetF14_2: 
NetF15_2: 
NetF16_2: 
NetF17_2: 
NetLED2_1: 
NetLED4_1: 
NetLED5_1: R34.38 RXD.38 | length 3.1
  Top Layer w0.508: R34.38 2.921,-6.35 RXD.38
NetLED7_1: R33.38 TXD.38 | length 2.9
  Top Layer w0.508: R33.38 TXD.38
NetLED8_1: LED.A R83.37 | length 3
  Top Layer w0.508: LED.A -32.707,-15.705 R83.37
NetLED10_1: LED_Z.A R3.2 | length 7.8
  Top Layer w0.508: R3.2 -26.424,8.492 LED_Z.A
NetLED12_1: DTU.9 R3.1 | length 3.5
  Top Layer w0.508: DTU.9 -29.693,9.474 R3.1
NetLED14_1: DTU.2 LED_W1.A | length 7.8
  Bottom Layer w0.381: DTU.2 -34.061,27.254 -34.722,27.915 -34.722,31.547 -33.901,32.368 LED_W1.A
NetLED16_1: DTU.1 LED_W2.A | length 4.5
  Bottom Layer w0.381: DTU.1 LED_W2.A@-29.883,32.982
NetP6_2: DTU.15 LED_W.A | length 3.2
  Top Layer w0.254: LED_W.A@4.297,6.934 DTU.15
NetP6_3: Power.38 R31.38 | length 3
  Top Layer w0.508: R31.38 -8.915,-6.35 Power.38
NetP7_2: P7.2 R29.37 R82.37 | length 11.4
  Top Layer w0.2: R29.37 R82.37@-12.065,-25.857
  Top Layer w0.203: R82.37@-12.065,-25.857 -11.989,-25.933 P7.2
NetQ1_1: 
NetQ1_3: 
NetQ2_1: 
NetQ2_3: 
NetQ3_1: 
NetQ3_3: 
NetQ4_1: 
NetQ4_3: 
NetQ6_1: 
NetQ6_3: 
NetQ7_1: 
NetQ7_3: 
NetQ8_1: 
NetQ8_3: 
NetQ9_1: 
NetQ9_3: 
NetR43_1: 
NetR61_1: 
NetR64_1: 
NetR65_1: 
NetR69_1: 
NetR70_1: 
NetR73_1: 
NetR74_1: 
NetU1_1: 
NetU3_7: 
NetU4_7: 
NetU5_7: 
NetU10_1: 
NetU11_1: 
NetU15_1: 
NetU16_1: 
P3.0: 
P3.1: 
RX: D22.K RS9.3 | length 3.7
  Top Layer w0.203: RS9.3 -22.27,26.351 D22.K
RXD0: D12.A D22.A DTU.7 P6.2 R34.37 U20.19 | length 130
  Top Layer w0.203: D12.A -35.636,39.413 -35.636,17.12 DTU.7 ; v1(-25.197,-20.726) -24.155,-20.726 -23.575,-21.307 U20.19 ; P6.2 -22.403,22.538 D22.A ; v1(-22.352,0.432) -0.457,0.432 2.896,-2.921 R34.37
  Bottom Layer w0.203: DTU.7 -30.937,14.554 ; v1(-25.197,-20.726) -25.197,-18.999 -26.01,-18.186 -32.385,-18.186 -34.011,-16.561 -34.011,-7.544 -30.937,-4.47 -30.937,0.457 ; P6.2 -22.403,16.002 -23.851,14.554 -30.937,14.554 ; v1(-22.352,0.432) -30.912,0.432 -30.937,0.457 ; -30.937,0.457 -30.937,14.554
RXD1: LED1.38 RS4.3 U20.45 | length 30.4
  Top Layer w0.203: LED1.38 v1(-25.075,-11.275) U20.45
  Bottom Layer w0.203: v1(-25.075,-11.275) -23.371,-11.275 -22.73,-11.916 RS4.3
RXD2: LED2.38 RS1.3 U20.38 | length 33.1
  Top Layer w0.203: v1(-24.105,-12.217) -21.601,-12.217 -21.575,-12.192 ; LED2.38 -24,-8.41 -21.575,-10.835 -21.575,-12.192 ; U20.38 -21.575,-12.192
  Bottom Layer w0.203: v1(-24.105,-12.217) -24.105,-32.128 RS1.3
RXD3: LED3.38 RS5.3 U20.36 | length 45.8
  Top Layer w0.203: U20.36 -17.983,-15.614 -18,-15.597 ; LED3.38 -18,-15.597 ; v1@1.194,-14.605 1.168,-14.63 -17.033,-14.63 -18,-15.597
  Bottom Layer w0.203: v1@1.194,-14.605 v1(1.27,-14.681) RS5.3
RXD4: LED4.38 RS2.3 U20.34 | length 47.4
  Top Layer w0.203: U20.34 -17.475,-16.614 -17.092,-16.231 v1(-12.04,-16.231) v1(0.025,-16.231) v1@0.051,-16.205 ; v1(-12,-13.829) LED4.38
  Bottom Layer w0.203: v1(-12.04,-16.231) -12,-16.191 v1(-12,-13.829) ; v1@0.025,-16.205 0.025,-32.255 RS2.3
RXD5: LED5.38 RS6.3 U20.31 | length 68.5
  Top Layer w0.203: U20.31 4.572,-18.114 6.1,-16.586 v1(11.938,-16.586) ; v1@12,-16.586 LED5.38
  Bottom Layer w0.203: v1(11.938,-16.586) 24.435,-16.586 25.27,-17.421 RS6.3
RXD6: LED6.38 RS3.3 U20.30 | length 71
  Top Layer w0.203: U20.30 4.978,-18.614 6.016,-17.577 v1(18.034,-17.577) 18.034,-6.384 LED6.38
  Bottom Layer w0.203: v1(18.034,-17.577) 22.987,-17.577 24.028,-18.618 24.028,-32.258 RS3.3
RXD7: LED7.38 RS7.3 U20.27 | length 110.4
  Top Layer w0.203: U20.27 v1@10.058,-20.114 ; RS7.3 0.559,31.801 0.559,4.445 5.385,-0.381 8.103,-0.381 10.058,-2.337 v1(10.058,-14.021) ; v1@24,-14.021 LED7.38
  Bottom Layer w0.203: v1(10.058,-20.091) v1(10.058,-14.021) v1(23.975,-14.021)
RXD8: LED8.38 RS8.3 U20.24 | length 115.8
  Top Layer w0.2: U20.24 -20.357,-21.996 v1(9.068,-21.996)
  Top Layer w0.254: RS8.3 -0.77,4.91 5.105,-0.965 7.798,-0.965 9.55,-2.718 9.55,-9.779 8.738,-10.592 v1(8.738,-13.03) ; v1(28.372,-13.03) 28.372,-7.978 LED8.38
  Bottom Layer w0.2: v1(8.738,-13.03) 8.738,-15.037 9.068,-15.367 v1(9.068,-21.996)
  Bottom Layer w0.254: v1(8.738,-13.03) v1(28.372,-13.03)
T1: C12.18 D3.K R15.18 | length 6.2
  Top Layer w0.5: D3.K 31.725,24.163 R15.18
T2: D3.A R24.31 T1.6 U5.7 U5.8 | length 36.6
  Top Layer w0.5: T1.6 19.016,31.047 26.238,23.825 ; R24.31 26.238,19.253 ; U5.7 27.94,20.955 U5.8@27.635,20.65 ; 26.238,19.253 26.657,19.672 ; 26.238,19.253 26.238,23.825 ; 26.238,23.825 27.44,23.825 D3.A ; 26.238,23.825 26.441,23.622 ; 26.441,23.622 D3.A@27.178,23.622 ; 26.441,23.622 26.657,23.406 ; 26.657,19.672 26.924,19.939 ; 26.657,19.672 26.657,23.406 ; 26.657,23.406 26.924,23.139 26.924,19.939 ; 26.924,19.939 27.191,20.206 ; D3.A@27.178,23.622 D3.A ; D3.A@27.178,23.622 27.191,23.609 27.191,20.206 ; 27.191,20.206 U5.8@27.635,20.65 ; U5.8@27.635,20.65 U5.8 27.643,20.963 D3.A
T3: C6.1 U2.4 U5.4 | length 7.1
  Top Layer w0.5: U5.4 32.334,14.478 C6.1 32.334,8.885 U2.4
T6: D4.A T1.2 | length 8.4
  Top Layer w0.5: T1.2 16.459,20.015 17.407,19.067 D4.A
T7: 
T8: T1.4
TX: D23.A RS9.4 | length 3.3
  Top Layer w0.203: D23.A -24.81,27.023 RS9.4
TXD0: D21.K D23.K DTU.6 P6.3 R33.37 U20.20 | length 121.7
  Top Layer w0.2: v1(-26.467,-19.634) -24.054,-19.634 -23.075,-20.613 U20.20
  Top Layer w0.254: D21.K -34.239,38.837 -35.204,37.871 -35.204,19.228 DTU.6 ; v1(-32.233,-0.737) -4.978,-0.737 -2.896,-2.819 R33.37 ; D23.K -24.943,23.198 P6.3
  Bottom Layer w0.254: v1(-32.233,-0.737) -34.544,-0.737 -34.595,-0.787 ; v1(-26.467,-19.634) -32.944,-19.634 -34.595,-17.983 -34.595,-0.787 ; P6.3 -24.943,17.983 -25.832,17.094 DTU.6 -34.595,15.57 -34.595,-0.787
TXD1: RS4.4 U20.46 | length 30.7
  Top Layer w0.2: v1(-27.28,-10.363) -25.575,-12.068 U20.46
  Bottom Layer w0.254: v1(-27.28,-10.363) -20.777,-10.363 -20.19,-10.95 RS4.4
TXD2: RS1.4 U20.37 | length 20.5
  Top Layer w0.203: v1(-21.869,-16.256) -21.869,-15.596 -21.075,-14.801 U20.37
  Bottom Layer w0.203: v1(-21.869,-16.256) -21.751,-16.374 -21.751,-31.942 RS1.4
TXD3: RS5.4 U20.35 | length 38.1
  Top Layer w0.203: U20.35 -17.755,-16.114 -17.109,-15.469 v1(3.759,-15.469) v1@3.785,-15.443
  Bottom Layer w0.203: RS5.4 v1@3.81,-15.469
TXD4: RS2.4 U20.33 | length 39.5
  Top Layer w0.203: U20.33 1.86,-17.114 v1(2.362,-16.612)
  Bottom Layer w0.203: v1(2.362,-16.612) 2.362,-32.052 RS2.4
TXD5: RS6.4 U20.32 | length 61.4
  Top Layer w0.203: U20.32 4.064,-17.614 5.905,-15.773 v1(10.82,-15.773)
  Bottom Layer w0.203: v1(10.82,-15.773) 26.289,-15.773 27.81,-17.294 RS6.4
TXD6: RS3.4 U20.29 | length 62
  Top Layer w0.203: U20.29 5.385,-19.114 6.084,-18.415 26.594,-18.415 v1(26.619,-18.39)
  Bottom Layer w0.203: v1(26.619,-18.39) 26.568,-18.44 26.568,-32.258 RS3.4
TXD7: RS7.4 U20.28 | length 87.4
  Top Layer w0.203: U20.28 5.791,-19.614 6.203,-19.202 v1(7.137,-19.202) ; RS7.4 -4.572,31.902 -4.572,7.087 4.572,-2.057 7.315,-2.057 8.28,-3.023 8.28,-9.373 6.706,-10.947 v1(6.706,-13.157)
  Bottom Layer w0.203: v1(6.706,-13.157) 6.706,-15.418 7.137,-15.85 v1(7.137,-19.202)
TXD8: RS8.4 U20.25 | length 86.1
  Top Layer w0.203: U20.25 v1@8.204,-21.114 ; RS8.4 -3.31,6.663 4.801,-1.448 7.29,-1.448 8.941,-3.099 8.941,-9.601 7.595,-10.947 v1(7.595,-12.014)
  Bottom Layer w0.203: v1(7.595,-12.014) 7.595,-15.215 8.179,-15.799 v1(8.179,-21.057) v1@8.204,-21.082
TXD_ISO: U20.39
TXD_ISO2: U20.40
TXD_ISO3: U20.42
TXD_ISO4: U20.43
U1-6: C41.19 U2.3 U5.3 | length 16.6
  Top Layer w0.5: U2.3 31.217,6.198 30.175,7.239 U5.3 30.175,17.018 30.886,17.729 C41.19
U1-7: R2.37 U2.1 | length 5
  Top Layer w0.5: U2.1 27.737,8.738 28.575,9.576 R2.37
U2-2: C9.33 U2.2 U6.2 | length 4.3
  Top Layer w0.5: U6.2 23.825,6.274 23.749,6.198 U2.2
USB_N: DTU.3 J1.A7 J1.B7 U19.6 ZD17.2 | length 34.4
  Top Layer w0.3: J1.A7 -25.98,44.907 ; -24.98,42.367 J1.B7 -24.98,44.933
  Top Layer w0.381: DTU.3 -31.369,26.416 -31.369,32.918 -29.058,35.23 -25.705,35.23 v1(-24.308,36.627) -24.308,41.695 -24.98,42.367 ; -25.98,44.907 -25.675,45.212 -25.146,45.212 -24.98,45.046 -24.98,44.933
  Bottom Layer w0.381: v1(-24.308,36.627) -20.041,36.627 v1(-18.745,37.922)
USB_P: DTU.4 J1.A6 J1.B6 U19.5 ZD13.1 | length 38.1
  Top Layer w0.3: J1.B6 -26.48,42.812 -26.365,42.697 ; -25.756,42.697 -25.48,42.973 J1.A6
  Top Layer w0.381: ZD13.1 -31.826,42.697 -26.492,42.697 ; DTU.4 -34.671,23.774 -34.671,30.836 -29.007,36.5 -26.492,36.5 -26.06,36.932 -25.171,37.821 -25.171,41.377 -26.06,42.266 ; -26.06,42.621 -26.06,42.266 ; -25.756,42.697 -26.365,42.697 -26.492,42.697 ; -26.492,42.697 -26.06,42.266
USBA: D12.K U19.2 | length 2.7
  Top Layer w0.381: D12.K -29.523,40.31 U19.2@-28.044,40.31
USBB: D21.A U19.3 | length 2.2
  Top Layer w0.381: D21.A@-30.107,38.684 -29.751,39.04 U19.3@-28.044,39.04
VCC: 
VCC1: C2.1 D4.K D14.A R2.38 R13.36 | length 23.5
  Top Layer w0.5: D14.A 13.775,11.811 14.664,12.7 17.17,12.7 ; D4.K@21.971,15.418 D4.K 21.827,15.672 C2.1 17.17,12.7 ; R2.38 25.578,11.811 24.689,12.7 17.17,12.7
VCC_5V_485: D13.A J1.A4 J1.A9 J1.B4 J1.B9 | length 13.1
  Top Layer w0.3: J1.A9 -27.98,45.654 ; J1.A4 -23.48,46.406
  Top Layer w0.508: -27.98,45.654 -27.229,46.406 -23.48,46.406 -19.837,46.406 D13.A@-19.456,46.025
VCC_IN: C9.34 R13.35 R14.32 U6.1 | length 8
  Top Layer w0.5: R14.32 C9.34@20.269,6.909 ; C9.34 C9.34@20.269,6.909 ; U6.1 19.888,8.738 19.812,8.661 19.812,7.366 C9.34@20.269,6.909
VIN: C42.20 C43.19 D13.K D14.K DTU.8 DTU.13 DTU.14 P6.1 R26.38 R28.38 R30.38 R31.37 R77.38 R78.38 R79.38 R80.38 R81.38 R82.38 RS1.2 RS2.2 RS3.2 RS4.2 RS5.2 RS6.2 RS7.2 RS8.2 RS9.2 U12.1 U19.16 U20.15 U20.16 U42.3 | length 329.1
  Top Layer w0.2: U20.15 -25.575,-25.347 -25.075,-24.847 U20.16
  Top Layer w0.508: v1(-33,-8.667) R26.38 -34.519,-6.35 -34.544,-6.325 ; RS1.2 -27.81,-33.497 RS4.2 -27.81,-27.8 ; R28.38 -26.924,-7.468 -25.781,-8.611 v1(-25.781,-8.667) ; C43.19@-25.575,-25.347 -25.575,-26.845 -26.53,-27.8 -32.88,-27.8 -34.544,-26.137 -34.544,-6.325 ; U19.16@-22.299,41.58 -20.734,41.58 D13.K -18.423,43.891 -14.021,43.891 -12.979,42.85 -12.979,34.211 RS9.2 -19.863,27.327 P6.1 -19.863,14.249 ; U42.3 -19.99,14.122 -19.863,14.249 ; v1(-20.955,-8.585) R30.38 ; v1(-15.011,-8.509) R81.38 ; R82.38 v1(-3.835,-23.622) v1@-3.81,-23.597 ; v1(-10.465,-8.611) -10.465,-5.105 -9.449,-4.089 R31.37 ; RS2.2 RS5.2 -3.81,-28.499 -2.921,-27.61 19.482,-27.61 20.19,-28.318 RS6.2 RS3.2 ; RS7.2 4.293,30.017 RS8.2 ; DTU.13 DTU.14 7.859,4.064 10.922,4.064 C42.20 14.503,3.581 U12.1 ; 10.922,4.394 10.922,5.418 D14.K ; v1(14.935,-8.641) R77.38 ; v1(21.006,-8.611) 21.057,-8.56 R78.38 ; v1@27,-8.534 R79.38 ; v1(29.337,-8.667) 32.202,-8.667 32.893,-7.976 R80.38 ; -34.544,-6.325 -34.544,-0.686 -34.976,-0.254 -34.976,11.074 -34.036,12.014 DTU.8 -21.692,12.014 -19.863,13.843 -19.863,14.249
  Bottom Layer w0.508: v1(-33,-8.667) v1(-25.781,-8.667) -3.734,-8.667 ; RS9.2 -14.622,27.432 1.742,27.432 RS8.2 ; RS5.2 -3.81,-8.743 -3.734,-8.667 ; U12.1 14.707,3.785 14.707,0.33 14.935,0.102 v1(14.935,-8.641) ; v1(29.337,-8.667) v1(27.051,-8.667) -3.734,-8.667
pads on no net: DTU.10 DTU.16 DTU.17 DTU.18 DTU.19 DTU.20 DTU.21 DTU.22 DTU.23 J1.2 J1.A5 J1.A8 J1.B5 J1.B8 J2.7 J2.10 T1.3 U5.2 U19.7 U19.8 U19.9 U19.10 U19.11 U19.12 U19.13 U19.14 U19.15 U20.1 U20.2 U20.3 U20.4 U20.5 U20.6 U20.7 U20.8 U20.9 U20.10 U20.11 U20.12 U20.14 U20.18 U20.23 U20.26 U20.41 U20.44 U20.48

## Polygon pours and split planes (outlines as drawn)
GND on Top Layer "BottomLayer-No Net" (solid, remove dead copper, pour order 0): -34.874,49.505 -34.874,15.367 -34.874,-35.56 -32.436,-37.998 -31.496,-38.938 -28.169,-38.938 32.537,-38.938 33.528,-37.948 34.011,-37.465 34.011,-34.341 34.011,-1.067 31.801,1.143 30.937,2.007 22.733,2.007 21.26,2.007 20.117,3.15 18.923,4.343 18.923,10.795 18.923,11.379 15.291,15.011 14.783,15.519 14.783,23.673 10.439,23.673 10.033,24.079 9.373,24.74 9.373,33.426 9.373,36.195 7.874,37.694 6.96,38.608 2.388,38.608 -17.023,38.608 -18.136,39.721 -18.39,39.975 -18.39,43.18 -18.39,48.616 -19.253,49.479 -19.304,49.53 -34.849,49.53
GND on Bottom Layer "BottomLayer-No Net" (solid, remove dead copper, pour order 2): -31.598,-39.065 -31.572,-39.04 -15.545,-39.04 31.445,-39.04 33.706,-36.779 33.96,-36.525 33.96,-35.357 33.96,-0.813 31.166,1.981 21.463,1.981 21.285,1.981 19.149,4.117 18.339,4.928 18.339,11.074 18.339,12.014 16.281,14.072 14.681,15.672 14.681,22.733 14.681,23.368 14.376,23.673 14.249,23.8 12.548,23.8 10.287,23.8 9.55,24.536 9.373,24.714 9.373,32.918 9.373,36.424 7.315,38.481 7.137,38.659 4.318,38.659 -17.45,38.659 -18.186,39.395 -18.44,39.649 -18.44,41.326 -18.44,48.666 -19.304,49.53 -19.329,49.555 -34.671,49.555 -34.671,49.53 -35.077,49.124 -35.255,48.946 -35.255,45.872 -35.255,-35.179 -31.496,-38.938

## Keep-outs
Keep-Out Layer:
  circle w0.254: c34,45 r1.6
  circle w0.254: c34,-45 r1.6
  circle w0.254: c-34,-45 r1.6
  lines w0.127: -37.75,-50 -37.75,50 37.75,50 37.75,-50

## Silkscreen, mask and mechanical layers (free items; w line width, h text height)
Top Overlay:
  circle w0.254: c34,45 r2
  circle w0.254: c34,-45 r2
  circle w0.254: c-34,-45 r2
  text "T20240603B_RS485/8L" at -31.064,5.207 h3
Bottom Overlay:
  circle w0.254: c-34,45 r1.6
Mechanical 1:
  lines w0.127: -37.75,-50 37.75,-50